# EAGLE board Chaser (EAGLE 5.10)
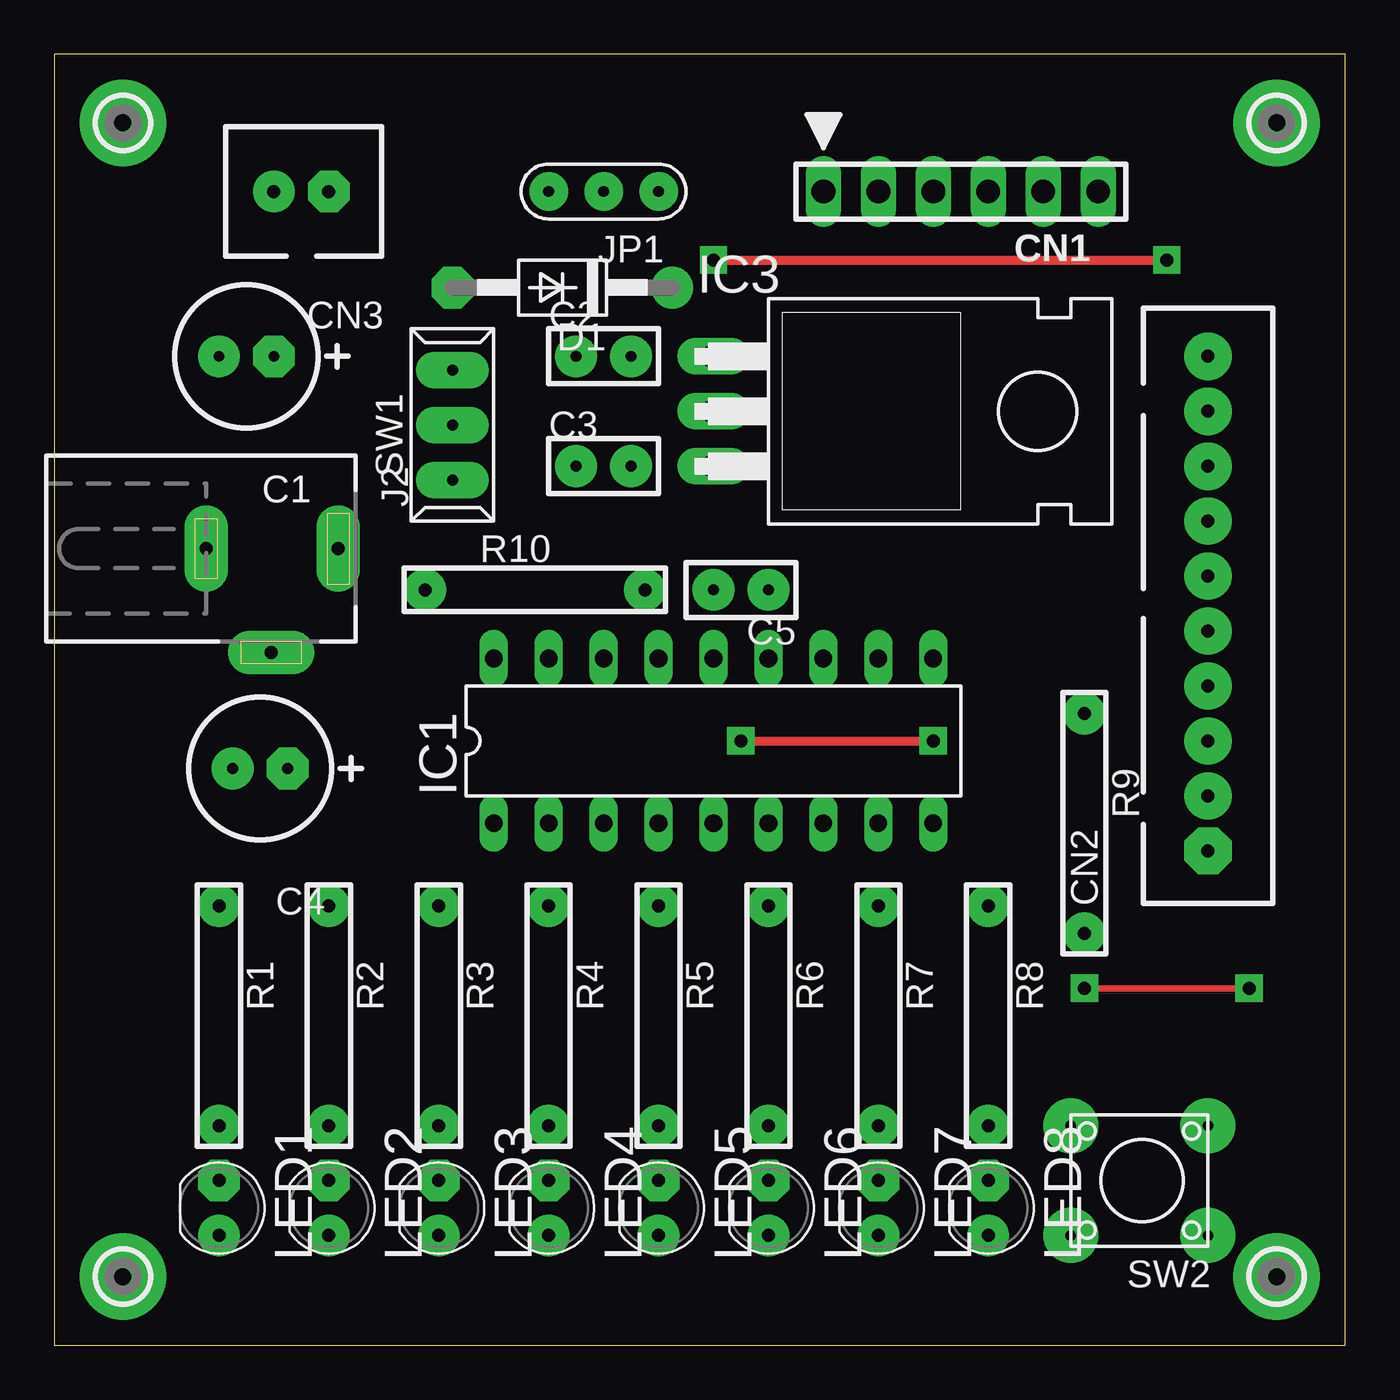
[diagram p0: board, top side]
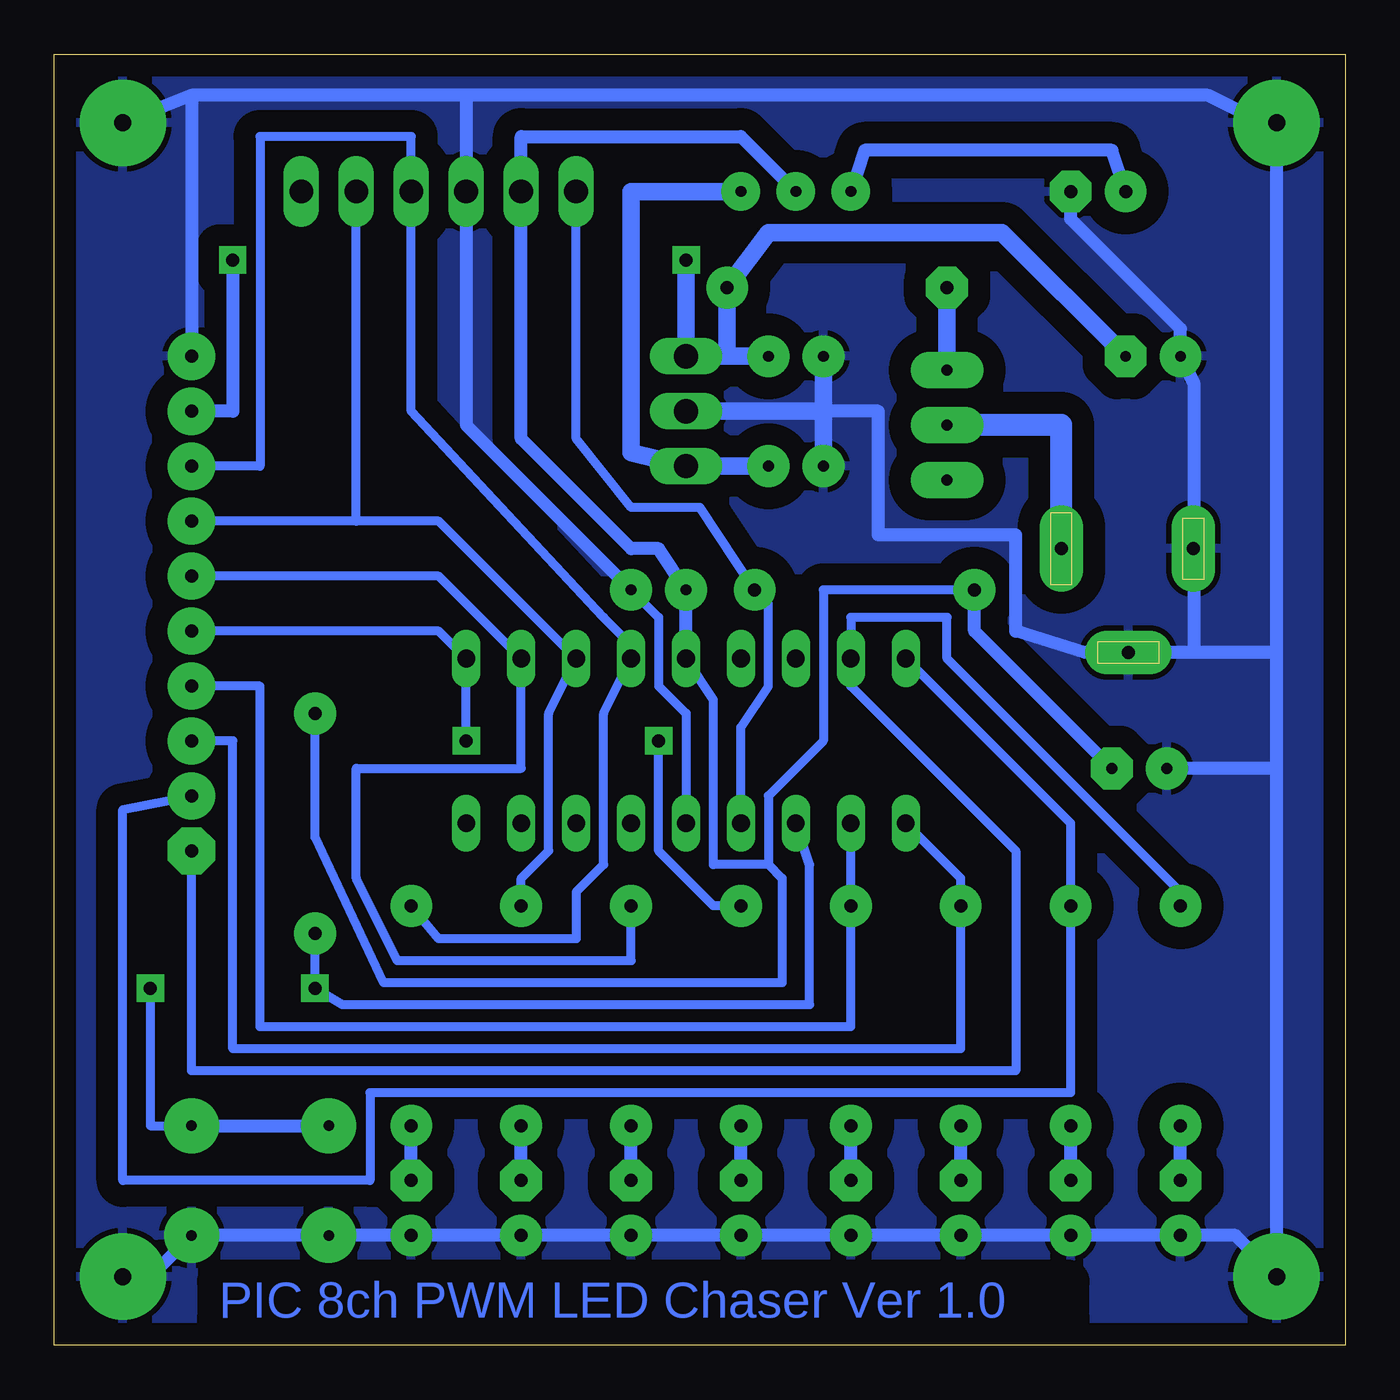
[diagram p1: board, bottom side, seen from below]

Size 59.69 x 59.69 mm. Coordinates in mm from the lower left corner, seen from the top.
Outline: 0,0 59.69,0 59.69,59.69 0,59.69 0,0
Copper layers (1*16): Top 0.035mm / dielectric 1.5mm / Bottom 0.035mm
Design rules "default": minimum track width 10mil, minimum drill 24mil, track to track 8mil, track to pad 8mil, pad to pad 8mil, via to via 8mil, smd to smd 8mil, copper to edge 40mil, drill to drill 8mil, minimum pad ring 10mil, minimum via ring 8mil, stop-mask expansion 4mil, vias tented up to drill 0mil, thermal gap 10mil

## Footprints (pad centres in the part's own frame; a part is rotated, then mirrored left to right if it is on the bottom)
CCAP_6.5 = drill 0.5 pad 1.93 octagon: + -1.27,0 | drill 0.5 pad 1.93 round: - 1.27,0
CAP_DIP_1 = drill 0.5 pad 1.93 round: 1 -1.27,0; 2 1.27,0
PIC_ICSP = drill 1.1 long: MCLR -6.35,0; NC 6.35,0; PGC 3.81,0; PGD 1.27,0; VDD -3.81,0; VSS -1.27,0
CON_HRS_DIP_10 = drill 0.6 pad 2.184 octagon: 1 -11.43,0 | drill 0.6 pad 2.184 round: 2 -8.89,0; 3 -6.35,0; 4 -3.81,0; 5 -1.27,0; 6 1.27,0; 7 3.81,0; 8 6.35,0; 9 8.89,0; 10 11.43,0
CON_HRS_DIP_2 = drill 0.6 pad 1.93 octagon: 1 -1.27,0 | drill 0.6 pad 1.93 round: 2 1.27,0
DO41-10 = drill 0.6 pad 1.93 octagon: A 5.08,0 | drill 0.6 pad 1.93 round: C -5.08,0
DIL18 = drill 0.813 long: 1 -10.16,-3.81; 2 -7.62,-3.81; 3 -5.08,-3.81; 4 -2.54,-3.81; 5 0,-3.81; 6 2.54,-3.81; 7 5.08,-3.81; 8 7.62,-3.81; 9 10.16,-3.81; 10 10.16,3.81; 11 7.62,3.81; 12 5.08,3.81; 13 2.54,3.81; 14 0,3.81; 15 -2.54,3.81; 16 -5.08,3.81; 17 -7.62,3.81; 18 -10.16,3.81
TO220H = drill 1.118 long: 1 -2.54,-7.62; 2 0,-7.62; 3 2.54,-7.62
DCJ0202 = drill 0.6 pad 2 long: 1 0,6.148; 2 4.8,3.048; 3 0,0.048
CSTLS = drill 0.5 pad 1.778 round: 1 -2.54,0; 2 0,0; 3 2.54,0
LED_3MM_VIRT_2 = drill 0.6 pad 1.93 octagon: A -1.27,0 | drill 0.6 pad 1.93 round: K 1.27,0
PAD-2.1 = drill 0.8 pad 4 round: B2,1 0,0
R_0.125W_4 = drill 0.6 pad 1.93 round: 1 -5.08,0; 2 5.08,0
DS-3 = drill 0.5 pad 1.676 long: 1 0,-2.54; 2 0,0; 3 0,2.54
B3F-10X = drill 0.5 pad 2.54 round: 1 -1.27,2.54; 2 5.08,2.54; 3 -1.27,-2.54; 4 5.08,-2.54

## Placement (x,y rotation side)
C1  47u/35V  [CCAP_6.5]  8.89,45.72 180 top
C2  0.1u  [CAP_DIP_1]  25.4,45.72 0 top
C3  0.1u  [CAP_DIP_1]  25.4,40.64 0 top
C4  10u/16V  [CCAP_6.5]  9.53,26.67 180 top
C5  0.1uF  [CAP_DIP_1]  31.75,34.92 180 top
CN1  PIC_ICSP  [PIC_ICSP]  41.91,53.34 0 top
CN2  [CON_HRS_DIP_10]  53.34,34.29 90 top
CN3  EXT PWR  [CON_HRS_DIP_2]  11.43,53.34 180 top
D1  1N4004  [DO41-10]  23.5,48.9 180 top
IC1  PIC16F628P  [DIL18]  30.48,27.94 0 top
IC3  7805HORIZ  [TO220H]  38.1,43.18 270 top
J2  DC_JACK  [DCJ0202]  6.99,36.83 270 top
JP1  [CSTLS]  25.4,53.34 180 top
LED1  RED  [LED_3MM_VIRT_2]  7.62,6.35 270 top
LED2  RED  [LED_3MM_VIRT_2]  12.7,6.35 270 top
LED3  RED  [LED_3MM_VIRT_2]  17.78,6.35 270 top
LED4  RED  [LED_3MM_VIRT_2]  22.86,6.35 270 top
LED5  RED  [LED_3MM_VIRT_2]  27.94,6.35 270 top
LED6  RED  [LED_3MM_VIRT_2]  33.02,6.35 270 top
LED7  RED  [LED_3MM_VIRT_2]  38.1,6.35 270 top
LED8  RED  [LED_3MM_VIRT_2]  43.18,6.35 270 top
MT1  MOUNT11  [PAD-2.1]  3.17,56.52 0 top
MT2  MOUNT2  [PAD-2.1]  3.17,3.17 0 top
MT3  MOUNT3  [PAD-2.1]  56.52,3.17 0 top
MT4  MOUNT4  [PAD-2.1]  56.52,56.52 0 top
R1  470  [R_0.125W_4]  7.62,15.24 270 top
R2  470  [R_0.125W_4]  12.7,15.24 270 top
R3  470  [R_0.125W_4]  17.78,15.24 270 top
R4  470  [R_0.125W_4]  22.86,15.24 270 top
R5  470  [R_0.125W_4]  27.94,15.24 270 top
R6  470  [R_0.125W_4]  33.02,15.24 270 top
R7  470  [R_0.125W_4]  38.1,15.24 270 top
R8  470  [R_0.125W_4]  43.18,15.24 270 top
R9  10K  [R_0.125W_4]  47.62,24.13 270 top
R10  10K  [R_0.125W_4]  22.23,34.92 0 top
SW1  POWER  [DS-3]  18.41,42.55 0 top
SW2  SELECT  [B3F-10X]  52.07,7.62 180 top

## Library data of the parts
C1-C5 CN2 CN3 IC3 J2 JP1 LED1-LED8 MT1-MT4 R1-R10 SW1 SW2 = MyLib
CN1 = 001mylib
D1 = diode
IC1 = microchip

## Nets
GND: C1.- C2.1 C3.1 C4.- C5.1 CN1.VSS CN2.10 CN3.1 IC1.5 IC3.2 J2.2 J2.3 LED1.K LED2.K LED3.K LED4.K LED5.K LED6.K LED7.K LED8.K MT1.B2,1 MT2.B2,1 MT3.B2,1 MT4.B2,1 SW2.1 SW2.2
LED1: CN2.1 IC1.17 R1.1
LED2: CN2.2 IC1.18 R2.1
LED3: CN2.3 IC1.1 R3.1
LED4: CN2.4 IC1.2 R4.1
LED5: CN2.5 IC1.10 R5.1
LED6: CN2.6 IC1.11 R6.1
LED7: CN1.PGC CN2.7 IC1.12 R7.1
LED8: CN1.PGD CN2.8 IC1.13 R8.1
N$1: LED1.A R1.2
N$2: LED2.A R2.2
N$3: LED3.A R3.2
N$4: LED4.A R4.2
N$5: LED5.A R5.2
N$6: LED6.A R6.2
N$7: LED7.A R7.2
N$8: LED8.A R8.2
N$9: D1.A SW1.3
N$10: CN3.2 JP1.3
N$11: C3.2 IC3.3 JP1.1
N$17: CN1.MCLR IC1.4 R10.2
N$18: IC1.3 R9.2 SW2.3 SW2.4
N$26: J2.1 SW1.2
VCC: C1.+ C2.2 CN2.9 D1.C IC3.1
VDD: C4.+ C5.2 CN1.VDD IC1.14 JP1.2 R9.1 R10.1

## Tracks (layer width: path | path; a pad name or v marks a point on that pad's centre or on a via)
GND
  Bottom 0.254: 55.24,3.17 MT3.B2,1 | MT1.B2,1 3.81,56.52
  Bottom 0.406: IC1.5 30.48,29.21 31.75,30.48 31.75,33.66 C5.1
  Bottom 0.61: 55.24,3.17 SW2.1 SW2.2 LED8.K LED7.K LED6.K LED5.K LED4.K LED3.K LED2.K LED1.K 5.08,5.08 MT2.B2,1 3.17,26.67 | 53.34,57.78 MT4.B2,1 | 53.34,57.78 CN2.10 | C5.1 40.64,42.55 CN1.VSS 40.64,57.78 | 6.99,37.47 J2.3 | 3.81,56.52 6.35,57.78 40.64,57.78 | 40.64,57.78 53.34,57.78 | 3.17,26.67 3.17,32.03 | 3.17,26.67 C4.- | 3.17,32.03 6.99,32.03 | 6.99,32.03 J2.2 12.06,32.03 15.24,33.02 15.24,37.47 21.59,37.47 21.59,43.18 24.13,43.18 | 3.17,32.03 MT1.B2,1 | 6.99,32.03 6.99,37.47 | CN3.1 12.7,52.07 7.62,46.99 C1.- 6.99,44.45 6.99,37.47
  Bottom 0.813: 24.13,43.18 C3.1 | 24.13,43.18 C2.1 | 24.13,43.18 IC3.2
  pour Bottom (isolate 1.016): 0,59.69 0,0 59.69,0 59.69,1.27 59.69,59.69
LED1
  Bottom 0.406: R1.1 7.62,20.95 18.41,31.75 18.41,33.66 22.86,33.66 IC1.17 22.86,30.48 15.24,22.86 15.24,12.7 53.34,12.7 CN2.1
LED2
  Bottom 0.406: IC1.18 12.7,24.13 R2.1 12.7,11.68 45.09,11.68 45.09,7.62 56.52,7.62 56.52,24.77 CN2.2
LED3
  Bottom 0.406: IC1.1 17.78,21.59 R3.1 17.78,13.72 51.44,13.72 51.44,27.94 CN2.3
LED4
  Bottom 0.406: IC1.2 R4.1 22.86,14.73 50.16,14.73 50.16,30.48 CN2.4
LED5  (via drill 0.6 pad 1.27)
  Top 0.406: v31.75,27.94 v40.64,27.94
  Bottom 0.406: CN2.5 41.91,33.02 IC1.10 v40.64,27.94 | R5.1 29.21,20.32 31.75,22.86 v31.75,27.94
LED6
  Bottom 0.406: CN2.6 41.91,35.56 IC1.11 38.1,26.67 45.72,26.67 45.72,21.59 43.81,17.78 33.02,17.78 R6.1
LED7
  Bottom 0.406: 45.72,38.1 CN2.7 | 45.72,38.1 41.91,38.1 IC1.12 36.83,29.21 36.83,22.86 38.1,21.59 R7.1 | 45.72,38.1 CN1.PGC
LED8
  Bottom 0.406: R8.1 41.91,18.8 35.56,18.8 35.56,20.95 34.29,22.23 34.29,29.21 IC1.13 33.02,32.38 34.29,33.66 43.18,43.18 CN1.PGD 43.18,55.88 50.16,55.88 50.16,40.64 CN2.8
N$1
  Bottom 0.61: LED1.A R1.2
N$2
  Bottom 0.61: LED2.A R2.2
N$3
  Bottom 0.61: LED3.A R3.2
N$4
  Bottom 0.61: LED4.A R4.2
N$5
  Bottom 0.61: LED5.A R5.2
N$6
  Bottom 0.61: LED6.A R6.2
N$7
  Bottom 0.61: LED7.A R7.2
N$8
  Bottom 0.61: LED8.A R8.2
N$9
  Bottom 0.813: SW1.3 D1.A
N$10
  Bottom 0.61: JP1.3 22.23,55.24 10.79,55.24 CN3.2
N$11
  Bottom 0.813: C3.2 IC3.3 33.02,41.27 33.02,53.34 JP1.1
N$17
  Bottom 0.406: IC1.4 27.94,28.57 26.67,30.48 26.67,34.29 R10.2 29.84,38.73 33.02,38.73 35.56,41.91 CN1.MCLR
N$18  (via drill 0.6 pad 1.27)
  Top 0.305: v47.62,16.51 v55.24,16.51
  Bottom 0.406: IC1.3 24.77,22.23 24.77,15.75 46.35,15.75 v47.62,16.51 R9.2 | SW2.3 55.24,10.16 v55.24,16.51
  Bottom 0.61: SW2.3 SW2.4
N$26
  Bottom 1.016: SW1.2 13.13,42.55 J2.1
VCC  (via drill 0.6 pad 1.27)
  Top 0.406: v30.48,50.16 v51.44,50.16
  Bottom 0.61: v51.44,50.16 51.44,43.18 CN2.9
  Bottom 0.813: 28.57,45.72 D1.C 26.67,51.44 15.88,51.44 C1.+ | 28.57,45.72 C2.2 | 28.57,45.72 IC3.1 v30.48,50.16
VDD
  Bottom 0.406: R9.1 47.62,23.5 44.45,16.76 26.04,16.76 26.04,21.59 26.67,22.23 | 26.67,22.23 29.21,22.23 29.21,29.84 IC1.14 | R10.1 24.13,34.92 24.13,27.94 26.67,25.4 26.67,22.23
  Bottom 0.61: C4.+ 17.14,33.02 R10.1 | JP1.2 27.94,55.88 38.1,55.88 CN1.VDD 38.1,41.91 33.02,36.83 31.75,36.83 C5.2 IC1.14

## Text on the board
Bottom: PIC 8ch PWM LED Chaser Ver 1.0